# Altium PCB PCB1.PcbDoc
Units mil, origin at the board's own origin, x right, y up, seen from the top; angles counter-clockwise.
Board outline 525 x 361 mil, 2 copper layers (Top Layer, Bottom Layer); 20 components, 26 nets, 101 pads, 24 vias.
Unrouted connection lines stored in the file: 10.
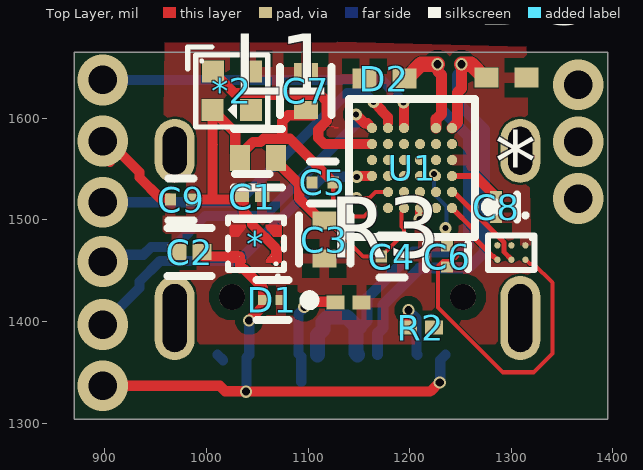
[diagram p0: Top Layer view]
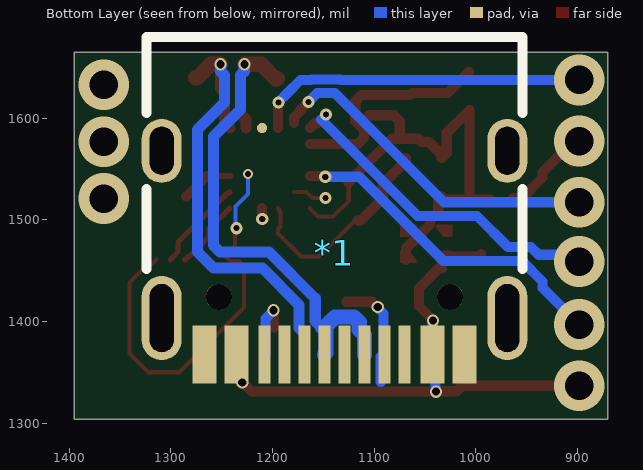
[diagram p1: Bottom Layer view, seen from below]
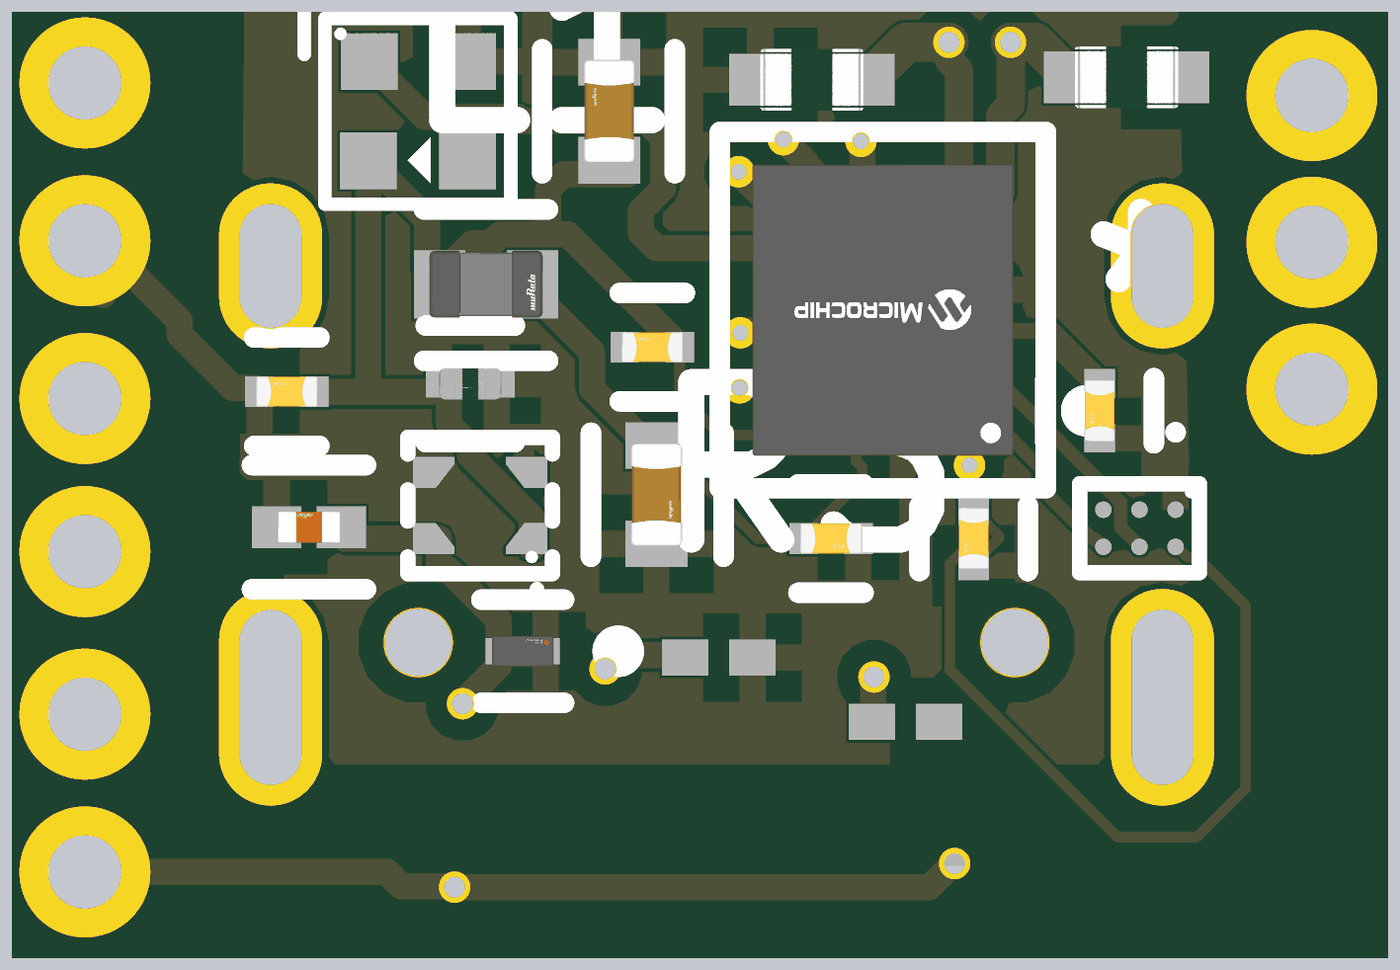
[diagram p2: 3D render of the assembled board from above, using the file's embedded part models]

## Layer stack, top to bottom
Top Solder: solder mask 0.4, Solder Resist, Dk 3.5
Top Layer: signal copper 1.4
Dielectric 1: dielectric 12.6, FR-4, Dk 4.8
Bottom Layer: signal copper 1.4
Bottom Solder: solder mask 0.4, Solder Resist, Dk 3.5

## Board outline
870,1304 1395,1304 1395,1665 870,1665

## Design rules (kind name [scope] priority, off if disabled: settings)
Clearance [All] p1: gap=1 ignorepadtopadclearanceinfootprint=TRUE except(3.5: Arc-Arc Arc-Track Track-Track; 10: Arc-THPad Arc-Via Arc-Text Arc-Hole Track-THPad Track-Via Track-Text Track-Hole SMDPad-THPad SMDPad-Hole THPad-THPad THPad-Text THPad-Hole Via-Text Via-Hole Fill-Text Fill-Hole Poly-Text Poly-Hole Region-Text Region-Hole Text-Text Text-Hole)
ComponentClearance [All] p1: gap=1 collisioncheckmode=3 verticalgap=100000 showdistances=TRUE donotcheckwithout3dbody=TRUE
DiffPairsRouting [All] p1: maxlimit=5 minlimit=5 mostfreqgap=5 impedanceprofiledriven=TRUE impedanceprofileid={8AA4297F-FB74-4142-97AB-F15C7AC21AE8} impedanceprofilevalue=90.000000 maxuncoupledlength=500
PolygonConnect [All] p1: connectstyle=Relief reliefconductorwidth=10 reliefentries=4 polygonreliefangle="90 Angle" airgapwidth=10
RoutingVias [All] p1: holewidth=6 width=12 viastyle="Through Hole" minholewidth=6 minwidth=12 maxholewidth=6 maxwidth=12
SilkToSilkClearance [All] p1 off: silktosilkclearance=10
SilkToSolderMaskClearance [IsPad] p1 off: minsilkscreentomaskgap=10 clearancetoexposedcopper=TRUE
SolderMaskExpansion [All] p1: expansion=0 istentingtop=FALSE
SupplyNets "Schematic Supply Nets_1" [InNet('VDDIN')] p1: voltage=0.000
SupplyNets "Schematic Supply Nets" [InNet('GND')] p2: voltage=0.000
ViasUnderSMD [All] p1: allowed=TRUE
Width [All] p1: maxlimit=10 minlimit=4 preferedwidth=10
26 further rules are at their usual default settings.

## Classes and differential pairs
differential pair D: +D_P -D_N

## Components (designator, comment, footprint, x,y, rotation, side; value= is the part's Value field where it differs from the comment)
* "BMA530" WLCSP-6_L1.0-W0.7-R2-C3-P0.35-BL 1300.22,1467.91 r180 top
* "SGM2040-3.3YUDH4G_TR_C5152920" UTDFN-4AL_L1.0-W1.0-P0.65-BL 1048.75,1476.6 r90 top value=SGM2040-3.3YUDH4G/TR_C5152920
*1 "USB_C_Receptacle_USB2.0_14P" USB_C_Receptacle_HRO_TYPE-C-31-M-12 1138.92,1526.66 r0 bottom locked
*2 "SK6805-EC15" LED-SMD_4P-L1.5-W1.5-BL 1025,1627 r270 top
C1 "220nF" FP-CL03-IPC_C 1045,1523 r0 top
C2 "1uF" FP-GCM033-0_09-IPC_B 983.47,1468.32 r180 top
C3 "10uF" FP-GRM155-0_2-MFG 1116,1480.7 r270 top
C4 "100nF" FP-CC0201-BB-MFG 1182.57,1464 r0 top
C5 "100nF" FP-CC0201-BB-MFG 1114.43,1537 r180 top
C6 "100nF" FP-CC0201-BB-MFG 1237,1464 r270 top
C7 "10uF" FP-GRM155-0_2-MFG 1098,1627 r90 top
C8 "1uF" FP-CC0201-BA-MFG 1285.05,1512.74 r270 top value="1 uF"
C9 "100nF" FP-CC0201-BB-MFG 975,1520 r180 top
D1 "ESD441DPLR" FP-DPL0002A-MFG 1065,1421 r180 top
D2 "ESD321DPYR" FP-DPY0002A-MFG 1175.28,1639 r0 top value=0.9pF
D3 "ESD321DPYR" FP-DPY0002A-MFG 1295.32,1640 r180 top value=0.9pF
L1 "10uH" FP-LQW15DN_00-MFG 1051,1561 r0 top
R2 "5.1K" RESC0603X28X15NL05T05 1211,1394 r0 top
R3 "5.1K" RESC0603X28X15NL05T05 1139.82,1418.62 r0 top
U1 "ATSAMD21E16B-UUT" FP-C04-21245-MFG 1202.37,1551.13 r180 top

## Footprints (in the part's own frame and the unit in brackets; to place one, negate y for a bottom-side part, rotate by r counter-clockwise, add the part's x,y. Pads: shape width x height; smd on the part's side, far side on the other; paste and mask are expansions set on the pad)
FP-C04-21245-MFG [mm]
  round 0.26 smd paste+0 mask+0: A1(-1,1) A2(-0.6,1) A3(-0.2,1) A4(0.2,1) A5(0.6,1) A6(1,1) B1(-1,0.6) B2(-0.6,0.6) B3(-0.2,0.6) B4(0.2,0.6) B5(0.6,0.6) C1(-1,0.2) C2(-0.6,0.2) C3(-0.2,0.2) C4(0.2,0.2) C5(0.6,0.2) C6(1,0.2) D1(-1,-0.2) D2(-0.6,-0.2) D3(-0.2,-0.2) D4(0.2,-0.2) D5(0.6,-0.2) D6(1,-0.2) E1(-1,-0.6) E2(-0.6,-0.6) E3(-0.2,-0.6) E4(0.2,-0.6) E5(0.6,-0.6) E6(1,-0.6) F1(-1,-1) F2(-0.6,-1) F4(0.2,-1) F5(0.6,-1) F6(1,-1)
  round 0.26 smd far side paste+0 mask+0: F3(-0.2,-1)
  silkscreen extent -2.1,-1.73 1.58,1.73, body extent -1.26,-1.41 1.26,1.41, height 0.48
FP-CC0201-BA-MFG [mm]
  rect 0.28x0.3 smd paste+0 mask+0: 1(-0.265,0) 2(0.265,0)
  silkscreen extent -0.32,-0.53 0.32,0.52, body extent -0.51,-0.27 0.5,0.27, height 0.25
FP-CC0201-BB-MFG [mm]
  rect 0.28x0.3 smd paste+0 mask+0: 1(-0.265,0) 2(0.265,0)
  silkscreen extent -0.31,-0.53 0.31,0.53, body extent -0.5,-0.28 0.51,0.28, height 0.25
FP-CL03-IPC_C [mil]
  rect 13.94x10.34 smd paste+0 mask+0: 1(-10.01,0) 2(10.01,0)
  silkscreen extent -17,-22 17,22, body extent -21,-10 21,10, height 10
FP-DPL0002A-MFG [mm]
  rect 0.28x0.25 smd paste+0 mask+0: 1(-0.22,0) 2(0.22,0)
  silkscreen extent -1.05,-0.5 0.4,0.5, body extent -0.46,-0.28 0.46,0.28, height 0.25
FP-DPY0002A-MFG [mm]
  rect 0.6x0.5 smd paste+0 mask+0: 1(-0.5,0) 2(0.5,0)
  body extent -0.9,-0.45 0.9,0.45, height 0.25
FP-GCM033-0_09-IPC_B [mil]
  rect 18.77x15.88 smd paste+0 mask+0: 1(-12.34,0) 2(12.34,0)
  silkscreen extent -22,-24 22,24, body extent -28,-14 28,14, height 10
FP-GRM155-0_2-MFG [mm]
  rect 0.45x0.6 smd paste+0 mask+0: 1(-0.475,0) 2(0.475,0)
  silkscreen extent -0.6,-0.64 0.6,0.65, body extent -0.8,-0.45 0.8,0.45, height 0.25
FP-LQW15DN_00-MFG [mm]
  rect 0.5x0.66 smd paste+0 mask+0: 1(-0.45,0) 2(0.45,0)
  silkscreen extent -0.6,-0.74 0.6,0.73, body extent -0.8,-0.48 0.8,0.48, height 0.25
LED-SMD_4P-L1.5-W1.5-BL [mm]
  rect 0.55x0.55 smd: 1(-0.48,-0.47) 2(0.48,-0.48) 3(0.48,0.48) 4(-0.48,0.48)
  silkscreen extent -1.1,-1.1 0.9,0.9
RESC0603X28X15NL05T05 [mm] "Chip Resistor, 2-Leads, Body 0.60x0.30mm, IPC Medium Density"
  rect 0.45x0.35 smd: 1(-0.325,0) 2(0.325,0)
  body extent -0.33,-0.17 0.33,0.18, height 0.28
USB_C_Receptacle_HRO_TYPE-C-31-M-12 [mm]
  rect 0.6x1.45 smd: A1(-3.25,4.045) A4(-2.45,4.045) A9(2.45,4.045) A12(3.25,4.045) B1(3.25,4.045) B4(2.45,4.045) B9(-2.45,4.045) B12(-3.25,4.045)
  rect 0.3x1.45 smd: A5(-1.25,4.045) A6(-0.25,4.045) A7(0.25,4.045) A8(1.25,4.045) B5(1.75,4.045) B6(0.75,4.045) B7(-0.75,4.045) B8(-1.75,4.045)
  rrect100% 1x1.6 hole 1.2 slot 0.6 at 0 deg: S1(-4.32,-1.05) S1(4.32,-1.05)
  rrect100% 1x2.1 hole 1.7 slot 0.6 at 0 deg: S1(-4.32,3.13) S1(4.32,3.13)
  round 0.65 hole 0.65: Un1(-2.89,2.6) Un2(2.89,2.6)
  silkscreen extent -4.7,-3.9 4.7,1.9
UTDFN-4AL_L1.0-W1.0-P0.65-BL [mm]
  round 0.005 smd: 1(-0.32,-0.4) 2(0.32,-0.4) 3(0.32,0.4) 4(-0.32,0.4)
  Top Layer region: 0.47,-0.65 0.17,-0.65 0.17,-0.6 0.17,-0.43 0.4,-0.25 0.47,-0.25
  Top Layer region: -0.17,-0.43 -0.17,-0.6 -0.17,-0.65 -0.47,-0.65 -0.47,-0.25 -0.4,-0.25
  Top Layer region: -0.17,0.55 -0.17,0.43 -0.4,0.25 -0.47,0.25 -0.47,0.65 -0.17,0.65
  Top Layer region: 0.47,0.25 0.4,0.25 0.17,0.43 0.17,0.65 0.47,0.65
  silkscreen extent -0.83,-0.7 0.66,0.7
WLCSP-6_L1.0-W0.7-R2-C3-P0.35-BL [mm]
  round 0.16 smd: A1(-0.35,-0.18) A2(-0.35,0.18) B1(0,-0.18) B2(0,0.18) C1(0.35,-0.18) C2(0.35,0.18)
  silkscreen extent -0.58,-0.98 0.58,0.43

## Part data
*: LCSC Part=C23296667, Manufacturer=Bosch(博世), MPN=BMA530, Supplier=https://www.lcsc.com/datasheet/C23296667.pdf
*: LCSC Part=C5152920, Manufacturer=SGMICRO(圣邦微), MPN=SGM2040-3.3YUDH4G/TR, Supplier=https://www.lcsc.com/datasheet/C5152920.pdf
*1: "USB 2.0-only 14P Type-C Receptacle connector", Datasheet=https://www.usb.org/sites/default/files/documents/usb_type-c.zip, Description_="USB 2.0-only 14P Type-C Receptacle connector", ki_fp_filters=USB*C*Receptacle*, ki_keywords="usb universal serial bus type-C USB2.0", Reference=J
*2: LCSC Part=C2890035, Manufacturer=欧思科光电, ki_keywords="Light Emitting Diodes (LED)", MPN=SK6805-EC15, Supplier=https://www.lcsc.com/datasheet/C2890035.pdf
C1: library part CMP-13271-003809-1, "Cap Ceramic 220nF 6.3V X5R ±20% Pad SMD 0201 +85°C T/R"
C2: library part CMP-06035-063262-1, "Chip Multilayer Ceramic Capacitors for Automotive, 1.0μF ±20%, +15.0/-50.0%, 2.5Vdc, 0201 (0603M)"
C3 C7: library part CMP-00260-135863762-1, "GRM155R60J106ME18D", Capacitance=10µF, Case/Package=0402, Dielectric=X5R, Voltage Rating (DC)=6.3V, Length=1mm, Lifecycle Status=Production, NexarPartId=135863762, Thickness=500µm, Width=500µm
C4 C5 C6 C9: library part CMP-03422-001280-2, "CAP CER 0.1UF 25V X5R 0201"
C8: library part CMP-03422-000660-2, "CAP CER 1UF 6.3V X5R 0201", Capacitance="1 uF", Manufacturer=Yageo, Manufacturer Part Number=CC0201MRX5R5BB105, Package=CC0201-BA, Temperature="-55°C to +85°C", Temperature Characteristic=X5R, Temperature Coefficient=15%, Temperature Range High=+85°C, Temperature Range Low=-55°C, Tolerance=0.2, Voltage Rating="6.3 V", Automotive=No, Category=Cap, ComponentLink2Description=Datasheet, ComponentLink2URL=http://www.yageo.com/documents/recent/UPY-GPHC_X5R_4V-to-50V_25.pdf, Device Class L1="Passive Components", Device Class L2=Capacitors, Device Class L3="Ceramic Capacitors", Digikey Description="CAP CER 1UF 6.3V X5R 0201", Footprint Url=http://www.yageo.com/exep/pages/download/literatures/UPY-C_GEN_24.pdf, Height=0.33mm, Ipc Land Pattern Name=CAPC6030X30, Lead Free=Yes, Material=Ceramic, Mouser Description="Multilayer Ceramic Capacitors MLCC - SMD/SMT 1.0uF 6.3V X5R 20%", Octopart=https://octopart.com/cc0201mrx5r5bb105-yageo-33242268, RoHS=TRUE
D1: library part CMP-00370-140306675-1, "ESD441DPLR 1-pF, 5.5-V, 30-KV ESD protection device in 0201 package 2-X2SON -40 to 125", Ambient Temperature Range High=150°C, Breakdown Voltage=6V, Capacitance=1pF, Clamping Voltage=3.8V, Manufacturer Lifecycle Status=ACTIVE, Max Operating Temperature=125°C, Min Operating Temperature=-40°C, Peak Pulse Current=6A, Peak Pulse Power=45W, Reverse Standoff Voltage=5.5V, Direction=Unidirectional, Height=320µm, Length=600µm, Lifecycle Status=Production, NexarPartId=140306675, Number of Channels=1, Number of Pins=2, Thickness=300µm, Width=300µm
D2 D3: library part CMP-04989-000001-1, "HDMI2.0 ESD PROTECTION", Ambient Temperature Range High=+125°C, Ambient Temperature Range Low=-40°C, Breakdown Voltage=4.5V, Capacitance=0.9pF, Clamping Voltage=6.8V, Manufacturer="Texas Instruments", Package=DPY0002A, Peak Pulse Current=6A, Peak Pulse Power=40W, Reverse Standoff Voltage=3.6V, Temperature="-40°C to +125°C", Automotive=No, Category=Diode, ComponentLink2Description=Datasheet, ComponentLink2URL=http://www.ti.com/lit/ds/symlink/esd321.pdf, Device Class L1="Circuit Protection", Device Class L2="TVS Diodes", Device Class L3=unset, Digikey Description="HDMI2.0 ESD PROTECTION", Direction=Unidirectional, Height=0.45mm, Lead Free=Yes, Manufacturer Part Number=ESD321DPYR, Number of Channels=1, Octopart=https://octopart.com/esd321dpyr-texas+instruments-94354200, RoHS=TRUE, Standoff Height=0mm, Temperature Range High=+125°C, Temperature Range Low=-40°C
L1: library part CMP-06042-016523-1, "FIXED IND 10UH 120MA 5.405OHM", RoHS Compliant=Yes
R2 R3: library part CMP-2004-00738-1, Manufacturer="Vishay Dale", Part Number=CRCW02015K10JNED
U1: library part CMP-00252-77761538-1, "ATSAMD21E16B-UUT MCU 32-Bit SAM D21E ARM Cortex M0+ RISC 64KB Flash 1.8V/2.5V/3.3V 35-Pin WLCSP T/R", Ambient Temperature Range High=85°C, Frequency=48MHz, Max Junction Temperature (Tj)=100°C, Max Supply Voltage=3.63V, Min Operating Temperature=-40°C, Min Supply Voltage=1.62V, Core Architecture=ARM, Data Bus Width=32b, Height=483µm, Interface="I2C, LIN, SPI, USART", Lifecycle Status=Production, Max Operating Temperature=85°C, Memory Size=64kB, Memory Type=FLASH, NexarPartId=77761538, Number of A/D Converters=1, Number of ADC Channels=10, Number of I2C Channels=4, Number of I/Os=26, Number of PWM Channels=6, Number of SPI Channels=4, Number of Timers/Counters=3, Number of UART Channels=4, Number of USB Channels=1, Oscillator Type=Internal, Packaging="Tape & Reel (TR)", Peripherals="Brown-out Detect/Reset, DMA, POR, PWM, WDT", RAM Size=8kB, RoHS=Compliant, Schedule B=8542310000

## Via types
v1: diameter 50, hole 28, Top Layer to Bottom Layer, 8 vias
v2: diameter 12, hole 6, Top Layer to Bottom Layer, 7 vias
v3: diameter 12, hole 8, Top Layer to Bottom Layer, 7 vias
v4: diameter 50/50 (per signal layer), hole 28, Top Layer to Bottom Layer, 1 vias
v5: diameter 10, hole 6, Top Layer to Bottom Layer, 1 vias

## Nets (pads, with @x,y where several pads share a name; then routed paths per layer and width w, separated by ;. In a path a pad name is that pad's centre, name@x,y a point inside that pad or via, vN(x,y) a via of type N, cw(c..) or ccw(c..) an arc to the next point about the centre after c; other vN are vias at no path point)
C6: U1.C6 | length 329.3
  Top Layer w10: v2(1148,1542.48) 1148.54,1542.48 1149.27,1543.21 1162.95,1543.21 U1.C6
  Bottom Layer w10: v1(898,1397) 934.16,1433.16 934.16,1439.45 954.48,1459.77 1031.99,1459.77 1114.7,1542.48 v2(1148,1542.48)
D_N: *1.A7 *1.B7 D2.2 U1.F2 | length 578.4
  Top Layer w10.91: U1.F2 1225.99,1599.1 1231.29,1604.4 1231.29,1642.62 1227.75,1646.15 1227.75,1653.1 v3(1227.55,1653.31)
  Top Layer w15: D2.2 1196.94,1639 1211.24,1653.31 v3(1227.55,1653.31)
  Bottom Layer w10.91: *1.A7 1148.76,1390.05 1152.54,1393.82 1152.54,1395.08 1157.9,1400.44 1157.9,1422.94 1203.42,1468.46 1251.56,1468.46 1257.95,1474.85 1257.95,1582.26 1231.34,1608.87 1231.34,1642.67 1227.75,1646.25 1227.75,1653.1 v3(1227.55,1653.31)
  Bottom Layer w15: *1.B7 1109.39,1386.86 1114.67,1392.14 1114.67,1399.47 1119.65,1404.45 1138.51,1404.45 1147.17,1395.79 1147.17,1369 *1.A7
D_P: *1.A6 *1.B6 D3.2 U1.F1 | length 466.9
  Top Layer w10.91: U1.F1@1241.9,1590.66 1247.2,1595.96 1247.2,1625.48 1251.05,1629.33 v3(1251.05,1653.31)
  Top Layer w15: v3(1251.05,1653.31) 1260.36,1653.31 1273.66,1640 D3.2
  Bottom Layer w10.91: *1.B6 1168.45,1388.49 1173.81,1393.85 1173.81,1416.35 1210.01,1452.55 1258.15,1452.55 1273.86,1468.26 1273.86,1588.85 1247.25,1615.46 1247.25,1642.67 1250.84,1646.25 1250.84,1653.1 v3(1251.05,1653.31)
GND: *2.3 *2.4 *.2 *.A1 C1.2 C2.2 C3.2 C4.2 C5.2 C6.2 C7.2 C8.2 C9.2 D1.1 D2.1 D3.1 R2.2 R3.2 U1.A3 U1.D1 U1.D3 U1.D6 | length 102
  Top Layer w10: v4(898,1577.6) 903.49,1577.6 934.14,1546.95 934.14,1541.84 954.48,1521.5 C9.2@962.94,1521.5 ; v2(1210,1501) 1210.2,1501.2 1210.2,1511.71 U1.A3
Net*1_A1: *1.A1 *1.A12 *1.B1 *1.B12 | length 7.7
  Bottom Layer w10: *1.B12 *1.B12@1016.44,1361.94
Net*1_A5: *1.A5 R3.1 | length 110.2
  Top Layer w10: v3(1096.4,1414.25) 1096.94,1414.25 1102.27,1419.57 R3.1@1127.02,1419.57
  Bottom Layer w10: *1.A5@1093.39,1340.48 1093.39,1365.53 1090.61,1368.31 1090.61,1407.92 1096.4,1413.71 v3(1096.4,1414.25)
Net*1_B5: *1.B5 R2.1 | length 64.9
  Top Layer w10: R2.1 1198.59,1394.39 1198.59,1410.79 v3(1198.97,1411.17)
  Bottom Layer w10: v3(1198.97,1411.17) 1198.97,1410.63 1206.91,1402.69 1206.91,1368.31 *1.B5
Net*2_1: *2.1 U1.E6 | length 219.2
  Top Layer w10: *2.1 1027.46,1624.93 1063.07,1624.93 1064.84,1623.16 1112.3,1623.16 1118.5,1616.95 1118.5,1597.41 1110.03,1588.94 1110.03,1580.65 1115.88,1574.79 1162.95,1574.79 U1.E6
Net*3_1: U1.E3
Net*3_2: U1.F4 | length 331.4
  Top Layer w10: v2(1194,1615.52) 1194,1614.98 1194.5,1614.48 U1.F4
  Bottom Layer w10: v1(898,1637.8) 1132.45,1637.8 1133.06,1638.41 1161.64,1638.41 1162.25,1637.8 1172.46,1637.8 1185.41,1624.86 1185.41,1624.65 1194,1616.06 v2(1194,1615.52)
Net*3_3: U1.F5 | length 341.5
  Top Layer w10: v2(1164.41,1616.16) 1173,1607.57 1173,1606.82 1178.7,1601.11 U1.F5@1178.7,1595.34
  Bottom Layer w10: v1(898,1517.4) 1031.14,1517.4 1138.65,1624.91 1156.05,1624.91 1164.41,1616.55 v2(1164.41,1616.16)
Net*3_4: U1.E4
Net*3_5: U1.E5
Net*3_6: U1.F6 | length 331.4
  Top Layer w10: v2(1147.35,1603.91) 1147.35,1603.52 1155.71,1595.16 1158.27,1595.16 1162.94,1590.5 U1.F6
  Bottom Layer w10: v1@900,1459 906.74,1465.74 938,1465.74 945.54,1473.27 967.98,1473.27 998.6,1503.9 1057.03,1503.9 1152,1598.87
  other v1: 898,1459
Net*4_1: 
Net*4_2: 
Net*4_3: 
Net*4_4: 
Net*4_5: 
Net*4_6: 
Net*_B2: *.B2 U1.B1 | length 91.8
  Top Layer w5: U1.B1 1242.74,1526.5 1244.34,1526.5 1293.09,1477.75 1293.09,1468.31 1300.22,1461.18 *.B2
SDA: *.C2 U1.A1 | length 70.3
  Top Layer w5: U1.A1 1262.67,1490.83 1262.67,1483.22 1281.88,1464 1282.92,1464 1286.09,1460.83 *.C2
VBUS: *1.A4 *1.A9 *1.B4 *1.B9 *.4 C2.1 D1.2 | length 558.8
  Top Layer w10: v1(898,1336.8) 1013.2,1336.8 1018.62,1331.38 1038.62,1331.38 v3(1039,1331) 1220.18,1331 1229.18,1340 v3(1229.72,1340) ; C2.1@994.65,1466.31 996.95,1464 *.4 1033,1452.09 1036.65,1452.09 1055.83,1432.92 1055.83,1415.32 1042.03,1401.51 v3(1042.03,1400.97)
  Bottom Layer w10: v3(1039,1331) 1039.38,1331.38 1039.38,1364.33 *1.A4 1042.25,1367.63 1042.25,1400.75 v3(1042.03,1400.97) ; v3(1229.72,1340) 1230.11,1340.38 1230.11,1362.14 *1.B4
VDDANA: C3.1 C4.1 L1.2 U1.A4 | length 209.5
  Top Layer w4: C3.1@1118.95,1499.4 1154.35,1464 C4.1 ; C4.1@1172.13,1464.39 1194.5,1486.76 1194.5,1491.05 1192,1493.54 1192,1507.57 1193.3,1508.88 1193.3,1510.56 U1.A4
  Top Layer w10: L1.2 1068.72,1557.85 1091.37,1535.19 1091.37,1521.08 1113.05,1499.4 C3.1
VDDCORE: C8.1 U1.C1 | length 51.6
  Top Layer w6: U1.C1 1264.58,1543.25
  Top Layer w10: 1264.58,1543.25 1284.65,1523.17 C8.1
VDDIN: *2.2 *.1 *.A2 C1.1 C5.1 C6.1 C7.1 C9.1 L1.1 U1.A6 U1.C2 | length 924
  Top Layer w4: C5.1@1124.87,1536.61 1124.87,1518.87 1140.26,1503.48 1155.17,1503.48 ; 1153.8,1503.48 1155.17,1503.48 ; U1.A6 1163,1511.31 1155.17,1503.48 ; U1.C2@1224.02,1541.28 U1.C2@1224.02,1543.25 ; v5(1224.02,1545.23) U1.C2 ; v2(1235.41,1491.92) 1236.75,1490.59 1236.75,1474.69 1246.75,1464.68 1246.75,1464.29 1241.86,1459.39 1232.8,1459.39 1227.91,1454.49 1227.91,1414.03 1291.84,1350.1 1322.12,1350.1 1340.68,1368.66 1340.68,1438.21 1322.12,1456.77 1318.68,1456.77 1314.62,1460.83 *.A2
  Top Layer w10: C9.1 1006.1,1520 ; 1068.43,1460.44 1068.43,1472.04 1044.9,1495.57 1044.9,1499.43 1036.79,1507.54 1036.79,1523 1033.19,1523 1030.19,1520 1006.1,1520 ; C7.1@1105,1603 1080.48,1603 1074.62,1597.14 1074.62,1579.99 ; C5.1 1124.87,1536.61 1124.87,1537.39 1082.27,1579.99 1074.62,1579.99 ; 1006.1,1520 *2.2 1028.44,1585.76 1028.44,1565.84 L1.1 1033.28,1564.15 1045.75,1576.61 1053.01,1576.61 1056.39,1579.99 1074.62,1579.99
  Bottom Layer w4: v5(1224.02,1545.23) 1224.02,1525.62 1236.49,1513.15 1236.49,1493 v2(1235.41,1491.92)
pads on no net: *1.A8 *1.B8 *1.S1 *1.Un1 *1.Un2 *.3 *.B1 *.C1 U1.A2 U1.A5 U1.B2 U1.B3 U1.B4 U1.B5 U1.C3 U1.C4 U1.C5 U1.D2 U1.D4 U1.D5 U1.E1 U1.E2 U1.F3
copper on no net: | length 90.7
  Top Layer w4: v2(1147.71,1521.48) 1160.46,1521.48 1166.48,1527.5 1178.75,1527.5
  Top Layer w10: 126.86,12140.09 126.91,12140.09 127,12140 ; 896,1561.25 900.75,1561.25 905,1557 ; 9045,480 9060,465 9060,440
  other v1: 1366,1521 1366,1577 1366,1633

## Polygon pours and split planes (outlines as drawn)
GND on Top Layer "GND_L01_P003" (solid, pour order 3): 958.91,1674.36 1127.91,1674.36 1128.91,1675.36 1314.91,1670.36 1321.91,1377.77 957.32,1377.77 955.91,1376.36
no net on Top Layer "NONET_L01_P002" (solid, pour order 2): 1113,1592 1125,1592 1126,1591 1130,1591
no net on Top Layer "NONET_L01_P001" (solid, pour order 1): 1009,1575 1010,1574 1011,1574